# Altium PCB PCB2.PcbDoc (part 2 of 3)
Units mm, origin at the board's own origin, x right, y up, seen from the top; angles counter-clockwise.
Board outline 98.9 x 50 mm, 4 copper layers (Top Copper, Signal Layer 1, Signal Layer 2, Bottom Copper), stack 1.564 mm thick; 154 components, 109 nets, 647 pads, 921 vias.
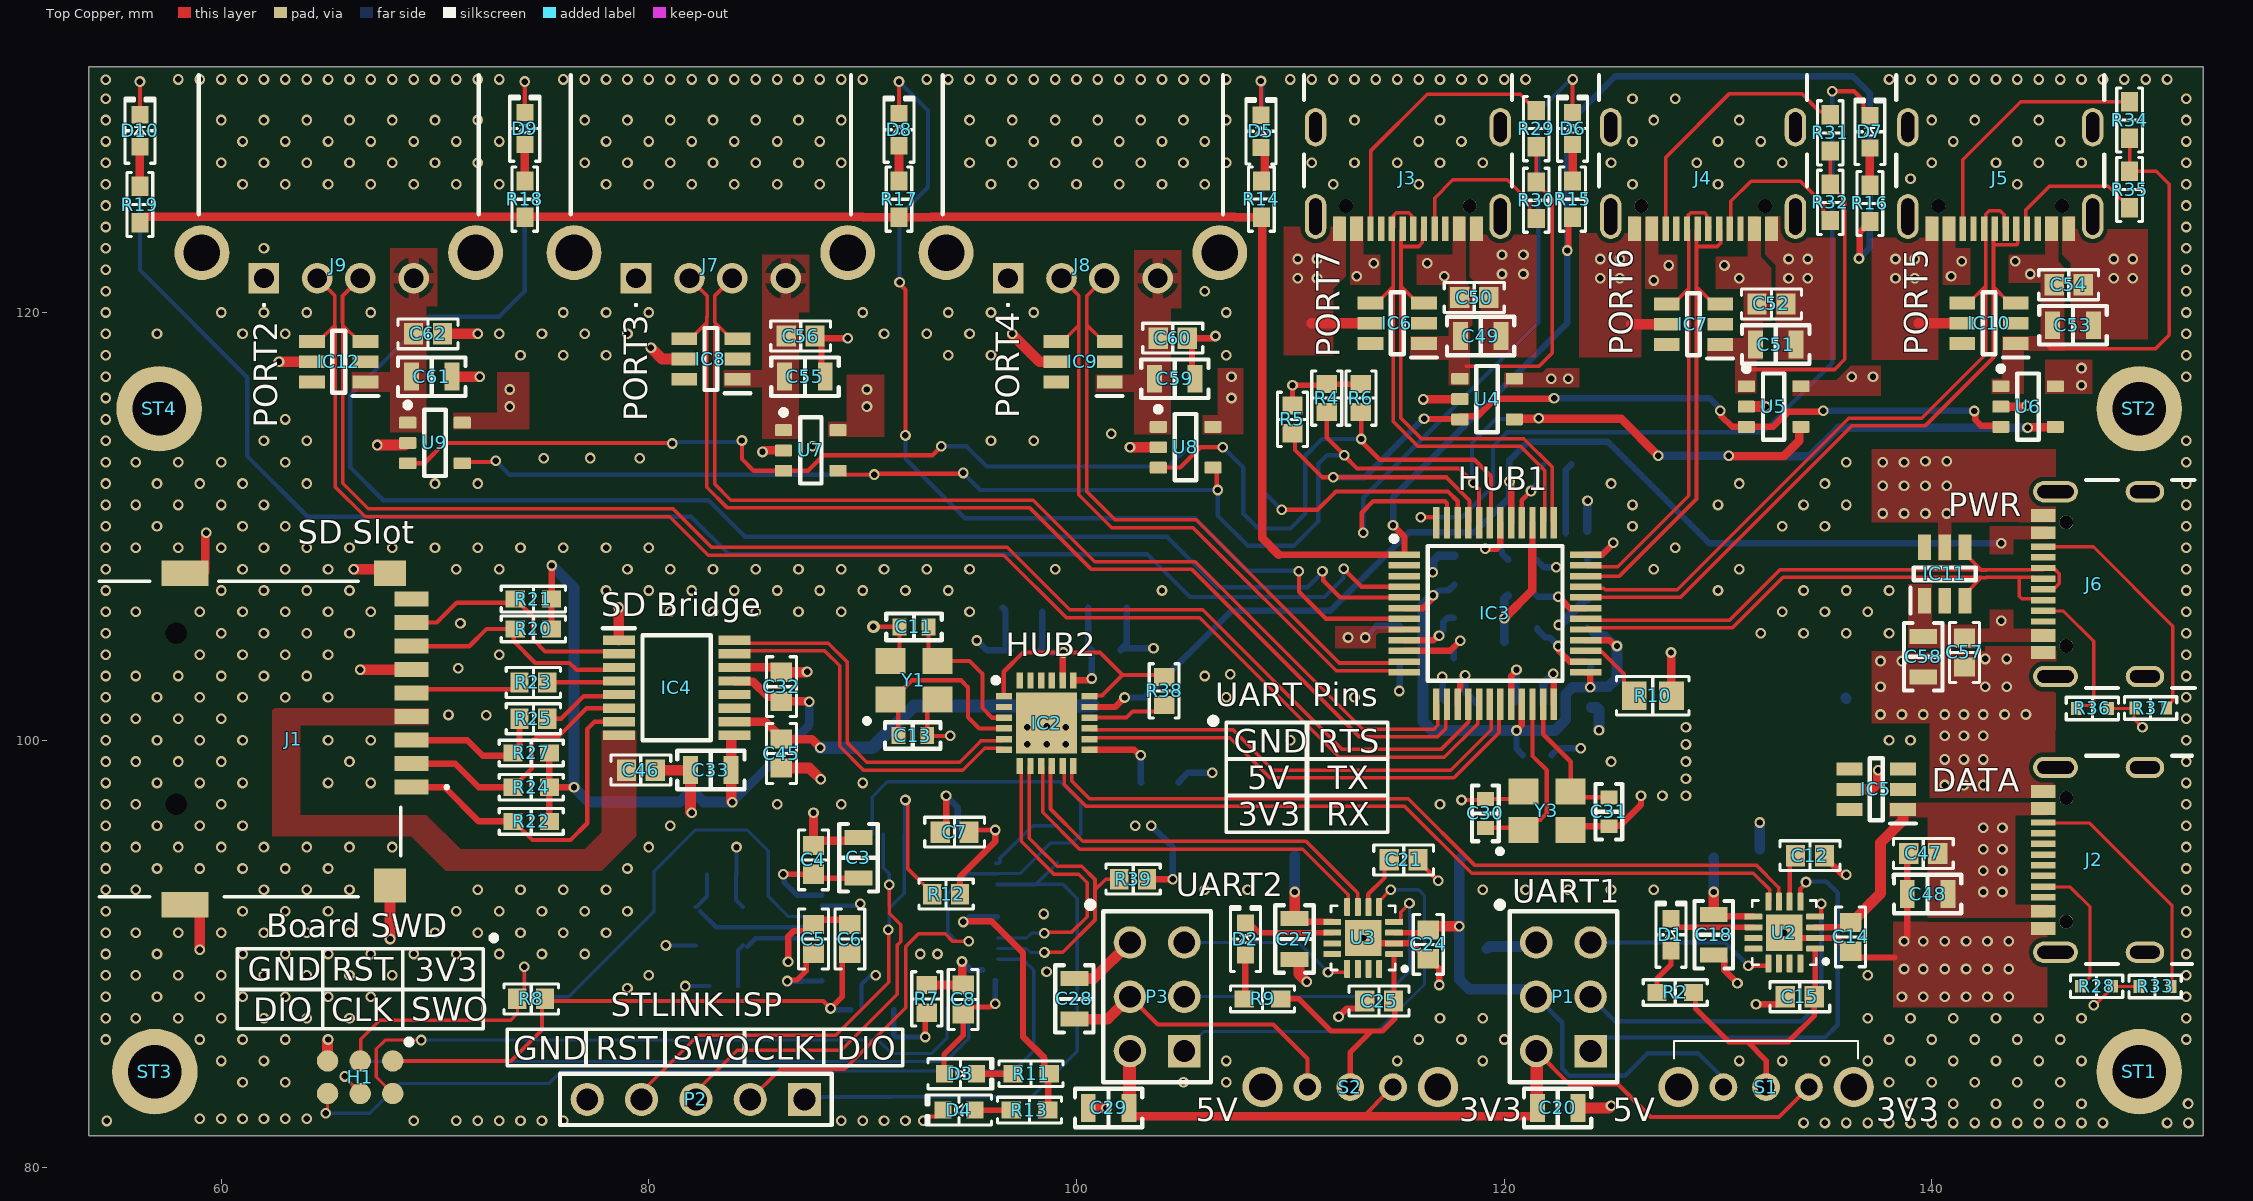
[diagram p0: Top Copper view]

## Via types
v1: diameter 0.5/0.5/0.5/0.5 (per signal layer), hole 0.3, Top Copper to Bottom Copper, tented both sides, 720 vias
v2: diameter 0.5, hole 0.3, Top Copper to Bottom Copper, tented both sides, 197 vias
v3: diameter 0.5, hole 0.3, Top Copper to Bottom Copper, 3 vias
v4: diameter 0.6/0.6/0.6/0.6 (per signal layer), hole 0.3, Top Copper to Bottom Copper, tented both sides, 1 vias

## Nets (pads, with @x,y where several pads share a name; then routed paths per layer and width w, separated by ;. In a path a pad name is that pad's centre, name@x,y a point inside that pad or via, vN(x,y) a via of type N, cw(c..) or ccw(c..) an arc to the next point about the centre after c; other vN are vias at no path point) (continued)
+5V_UPSTREAM: (continued)
  Bottom Copper w0.3: v1(102.249,101.994) 103.193,101.994 107.254,106.054 111.864,106.054 115.531,109.721 118.621,109.721 120.247,111.347 v1(120.247,112.092) 120.247,113.089 121.115,113.957 124.843,113.957 129.595,109.205 v1(143.243,109.205)
  other v1: 143.25,105.589
+VCARD: C46.2 IC4.8 J1.4 | length 0.2
  Top Copper w0.3: IC4.8@78.559,100.187 IC4.8@78.6,100.228 ; C46.2@78.85,98.7 C46.2@78.95,98.6
BOOT0: R7.2 U1.44 | length 3.9
  Top Copper w0.25: v1(92.922,86.117) 92.922,87.172 R7.2@93,87.25
  Bottom Copper w0.25: U1.44@91.45,87.4 91.45,86.216 91.549,86.117 v1(92.922,86.117)
CLK: J1.5 R23.2 | length 5.3
  Top Copper w0.2: J1.5@68.9,102.2 69.084,102.384 73.634,102.384 R23.2@73.95,102.7
CMD: J1.3 R25.2 R27.1 | length 6.8
  Top Copper w0.3: J1.3@68.9,100 71.514,100 72.235,99.279 73.529,99.279 R27.1@73.65,99.4 ; R27.1@73.7,99.4 73.95,99.65 R25.2@73.95,101
D0: IC4.3 J1.7 R20.1 | length 11.3
  Top Copper w0.2: J1.7@68.908,104.392 71.602,104.392 72.409,105.198 R20.1@73.75,105.2 ; R20.1@73.75,105.2 73.689,105.139 73.689,104.611 74.686,103.614 76.286,103.614 76.602,103.298 78.496,103.298 IC4.3@78.6,103.402
D1: IC4.2 J1.8 R21.1 | length 11.9
  Top Copper w0.2: J1.8@68.9,105.5 70.085,105.5 71.015,106.431 73.581,106.431 R21.1@73.75,106.6 73.8,106.6 74.1,106.3 74.1,106.25 74.6,105.75 74.6,104.7 75.15,104.15 78.488,104.15 IC4.2@78.6,104.038
D2: IC4.7 J1.1 R22.1 | length 15.6
  Top Copper w0.2: R22.1@73.65,96.2 73.7,96.2 74.564,95.336 76.336,95.336 77.117,96.117 77.117,100.517 77.462,100.862 IC4.7@78.6,100.862
  Top Copper w0.3: J1.1@68.9,97.8 70.453,97.8 72.053,96.2 R22.1@73.65,96.2
D3: IC4.6 J1.2 R24.1 | length 12.4
  Top Copper w0.2: R24.1@73.65,97.8 73.7,97.8 74,98.1 74,98.15 74.528,98.678 74.528,99.928 74.8,100.2 75.8,100.2 77.098,101.498 IC4.6@78.6,101.498
  Top Copper w0.3: J1.2@68.9,98.9 70.948,98.9 72.048,97.8 R24.1@73.65,97.8
DRV: IC3.1 R14.2 R15.2 R16.2 R17.2 R18.2 R19.2 | length 125.3
  Top Copper w0.3: 109.459,108.675 114.662,108.675 IC3.1@115.337,108.675 115.337,109.513 v1(114.8,110.05) ; v1(122.95,122.9) 123.007,122.957 123.007,124.257 R15.2@123.2,124.45 ; v1(136.593,122.526) 136.63,122.562 136.63,123.754 136.826,123.95 136.85,123.95 137.1,124.2 R16.2@137.1,124.25
  Top Copper w0.4: R19.2@56.2,124.2 56.2,124.25 56.432,124.482 74.168,124.482 R18.2@74.2,124.45 74.232,124.482 89.997,124.482 90.029,124.45 R17.2@91.7,124.45 91.704,124.454 93.175,124.454 93.203,124.482 107.397,124.482 107.425,124.454 R14.2@108.643,124.454 108.683,124.414 108.683,109.451 109.459,108.675
  Bottom Copper w0.3: v1(114.8,110.05) 114.819,110.069 114.819,111.369 122.95,119.5 v1(122.95,122.9) 122.95,128.8 125.2,131.05 136.297,131.05 137.1,130.247 137.1,123.032 v1(136.593,122.526)
FE1.1_VD33: C9.2 C10.1 IC2.1 IC2.18 IC2.20 R38.1 | length 16
  Top Copper w0.2: IC2.1@96.6,102.05 96.6,103.2 97.5,104.1 v1(99.375,104.1) 101.104,104.1 102.155,103.049 ; IC2.18@100.6,102.05 100.643,102.093 101.2,102.093 102.155,103.049 ; R38.1@104.1,102.95 104.001,103.049 102.155,103.049
  Top Copper w0.3: IC2.20@99.35,102.8 99.35,104.075 v1(99.375,104.1)
  Bottom Copper w0.3: C10.1@98.2,104.1 C10.1@98.287,104.188 ; C10.1@98.275,104.2 98.375,104.1 v1(99.375,104.1) ; C10.1@98.287,104.088 98.4,104.2 C9.2@98.4,106
FE1.1RST: IC2.16 R38.2 | length 3.7
  Top Copper w0.2: IC2.16@100.607,101.057 102.337,101.057 102.625,101.345 103.795,101.345 R38.2@104.1,101.65
FE2.1_VD18: C35.2 C42.1 C43.1 C44.1 IC3.6 IC3.21 IC3.25 IC3.28 | length 29.3
  Top Copper w0.3: IC3.6@115.337,106.175 116.2,106.175 116.615,106.591 116.615,106.723 v1(116.673,106.78) ; v1(120.575,100.45) 120.575,100.461 120.825,100.711 IC3.21@120.825,101.687 ; IC3.25@123.813,103.175 124.025,103.175 v1(124.025,102.475) ; IC3.28@123.815,104.675 124.488,104.675 124.491,104.673 124.926,104.673 125.196,104.403 v1(125.277,104.403)
  Bottom Copper w0.3: v1(116.673,106.78) 116.717,106.78 116.937,107 117.4,107 C43.1@117.675,107.275 ; v1(120.575,100.45) 120.575,99.6 C42.1@120.875,99.3 ; C44.1@123.875,105.25 124.175,104.95 124.73,104.95 v1(125.277,104.403) ; v1(124.025,102.475) 124.025,103.375 C35.2@124.075,103.425
  Bottom Copper w0.5: v1(116.673,106.78) 116.202,106.31 116.202,100.873 116.625,100.45 v1(120.575,100.45) 122.375,100.45 122.875,100.95 122.875,102.15 123.2,102.475 v1(124.025,102.475) 124.044,102.494 124.871,102.494 125.277,102.9 v1(125.277,104.403)
FE2.1_VD33: C34.2 C36.1 C37.1 C38.1 C39.1 C40.1 C41.1 IC3.9 IC3.15 IC3.20 IC3.26 IC3.31 IC3.36 IC3.42 R26.1 | length 24.6
  Top Copper w0.3: IC3.9@115.337,104.675 116.693,104.675 116.903,104.884 v1(116.957,104.884) ; IC3.15@117.825,101.687 117.825,102.275 117.936,102.386 117.936,102.513 117.954,102.531 117.954,102.755 118.171,102.972 v1(118.171,103.026) ; v1(119.109,108.955) 119.655,108.955 119.825,109.125 IC3.42@119.825,110.163 ; IC3.20@120.325,101.687 120.325,103 120.575,103.25 v1(120.575,103.3) ; v1(122.525,104.4) 122.582,104.343 122.582,104.165 123.072,103.675 IC3.26@123.813,103.675 ; v1@122.625,106.725 122.682,106.668 122.682,106.565 123.072,106.175 IC3.31@123.813,106.175 ; IC3.36@123.813,108.675 124.587,108.675 125.1,109.188 v1(125.1,109.225)
  Bottom Copper w0.3: v1(116.957,104.884) 116.957,104.938 117.15,105.132 117.15,105.525 117.35,105.725 C34.2@117.65,105.725 ; v1(118.171,103.026) 118.171,102.229 118.325,102.075 118.375,102.075 118.675,101.775 C36.1@118.675,101.725 ; v1(119.109,108.955) 119.786,108.955 119.9,108.841 119.9,108.725 C41.1@120.2,108.425 ; C39.1@120.475,101.725 120.575,101.825 v1(120.575,103.3) ; C40.1@121.475,106.8 121.575,106.7 v1(122.525,106.7) ; 121.55,105.225 121.55,105.175 121.925,104.8 122.125,104.8 v1(122.525,104.4) ; 122.883,109.684 122.883,112.633 R26.1@123.15,112.9 ; C37.1@123.875,108.45 124.05,108.625 124.5,108.625 v1(125.1,109.225)
FE2.2RST: IC3.40 R26.2 | length 3.2
  Top Copper w0.2: IC3.40@120.825,110.163 120.825,111.22 v1(121.255,111.65)
  Bottom Copper w0.2: v1(121.255,111.65) 121.255,111.758 121.525,112.028 121.525,112.575 R26.2@121.85,112.9
FE2_EN: IC3.44 R4.2 U4.4 U5.4 U6.4 U7.4 U8.4 U9.4 | length 97.2
  Top Copper w0.2: U9.4@71.275,112.95 71.331,113.006 72.781,113.006 v1(72.838,113.062) ; U7.4@88.85,112.6 89.024,112.426 v1@90.541,112.426 ; v1(90.547,112.42) 90.648,112.462 94.662,112.462 v1(94.698,112.498) ; U8.4@106.375,112.75 106.385,112.75 106.56,112.575 106.56,111.74 v1(106.6,111.7) ; R4.2@111.7,115.35 111.7,114.15 v1@112.521,113.329 ; v1(112.522,113.329) 112.522,113.3 113.114,112.709 117.891,112.709 v1(118.556,112.044) ; v1@118.535,112.023 118.825,111.734 IC3.44@118.825,110.163
  Top Copper w0.4: U4.4@120.475,115 120.5,115.025 121.589,115.025 v1(121.613,115.049) ; v1@121.626,115.036 125.464,115.036 v1(127.2,113.3) ; v1(130.5,113.3) 130.526,113.274 133.074,113.274 133.8,114 U5.4@133.8,114.671 ; v1(144.478,114.616) 144.495,114.633 145.758,114.633 U6.4@145.775,114.65
  Bottom Copper w0.2: v1(72.838,113.062) 73.484,112.416 v1@90.544,112.416 ; v1(94.698,112.498) 95.496,111.7 v1(106.6,111.7) 106.6,110.509 108.014,109.095 110.176,109.095 111.3,110.219 111.3,112.9 111.729,113.329 v1(112.522,113.329) ; v1(118.556,112.044) 118.5,112.1 118.5,113.9 119.624,115.024 121.589,115.024 v1(121.613,115.049)
  Bottom Copper w0.4: v1(127.2,113.3) v1(130.5,113.3) 130.526,113.274 134.304,113.274 135.635,114.605 v1@144.467,114.605
FE2_OC1: IC3.45 R5.2 U4.3 U5.3 U6.3 | length 45.4
  Top Copper w0.2: R5.2@110.1,114.35 110.215,114.235 110.215,113.568 111.483,112.3 v1(112,112.3) 117.285,112.3 118.382,111.202 118.382,110.22 IC3.45@118.325,110.163
  Top Copper w0.3: v1(116.255,115.035) 116.273,115.017 117.783,115.017 117.8,115 U4.3@117.925,115.125 ; U4.3@117.925,115.15 118.75,115.15 119.568,115.968 122.311,115.968 v1(122.333,115.99) ; v1(130.1,115.4) 130.157,115.343 130.157,115.153 130.66,114.65 U5.3@131.325,114.65 132.576,114.65 133.293,115.368 134.887,115.368 v1(134.919,115.4) ; v1(141.984,115.392) 142.022,115.354 142.022,114.978 142.295,114.705 143.17,114.705 U6.3@143.225,114.65
  Bottom Copper w0.3: v1(112,112.3) 113.478,112.3 116.213,115.035 v1(116.255,115.035) ; v1(122.333,115.99) 129.61,115.99 130.1,115.5 v1(130.1,115.4) ; v1(134.919,115.4) 141.976,115.4 v1(141.984,115.392)
FE2_OC5: IC3.43 R6.2 U7.3 U8.3 U9.3 | length 67.2
  Top Copper w0.2: U9.3@68.725,112.95 69.496,112.95 70.448,113.902 81.06,113.902 v1(81.089,113.873) ; v1(84.354,114.012) 84.354,113.145 84.899,112.6 U7.3@86.3,112.6 87.45,112.6 88.174,113.324 93.261,113.324 v1(93.676,113.739) ; U8.3@103.825,112.75 104.85,112.75 105.8,113.7 v1(106.846,113.7) ; R6.2@113.3,115.35 113.317,115.333 v1(113.317,114.085) ; v1@113.317,113.983 114.183,113.117 118.608,113.117 119.383,112.342 119.383,110.885 119.375,110.877 119.375,110.213 IC3.43@119.325,110.163
  Bottom Copper w0.2: v1(81.089,113.873) 81.159,113.943 84.284,113.943 v1(84.354,114.012) ; v1(93.676,113.739) 94.861,113.739 95.8,112.8 104.3,112.8 105.2,113.7 v1(106.846,113.7) 107.8,112.746 107.8,110.6 108.5,109.9 110,109.9 110.7,110.6 110.7,113.3 111.485,114.085 v1(113.317,114.085)